# EAGLE board feederboard (EAGLE 9.0.0)
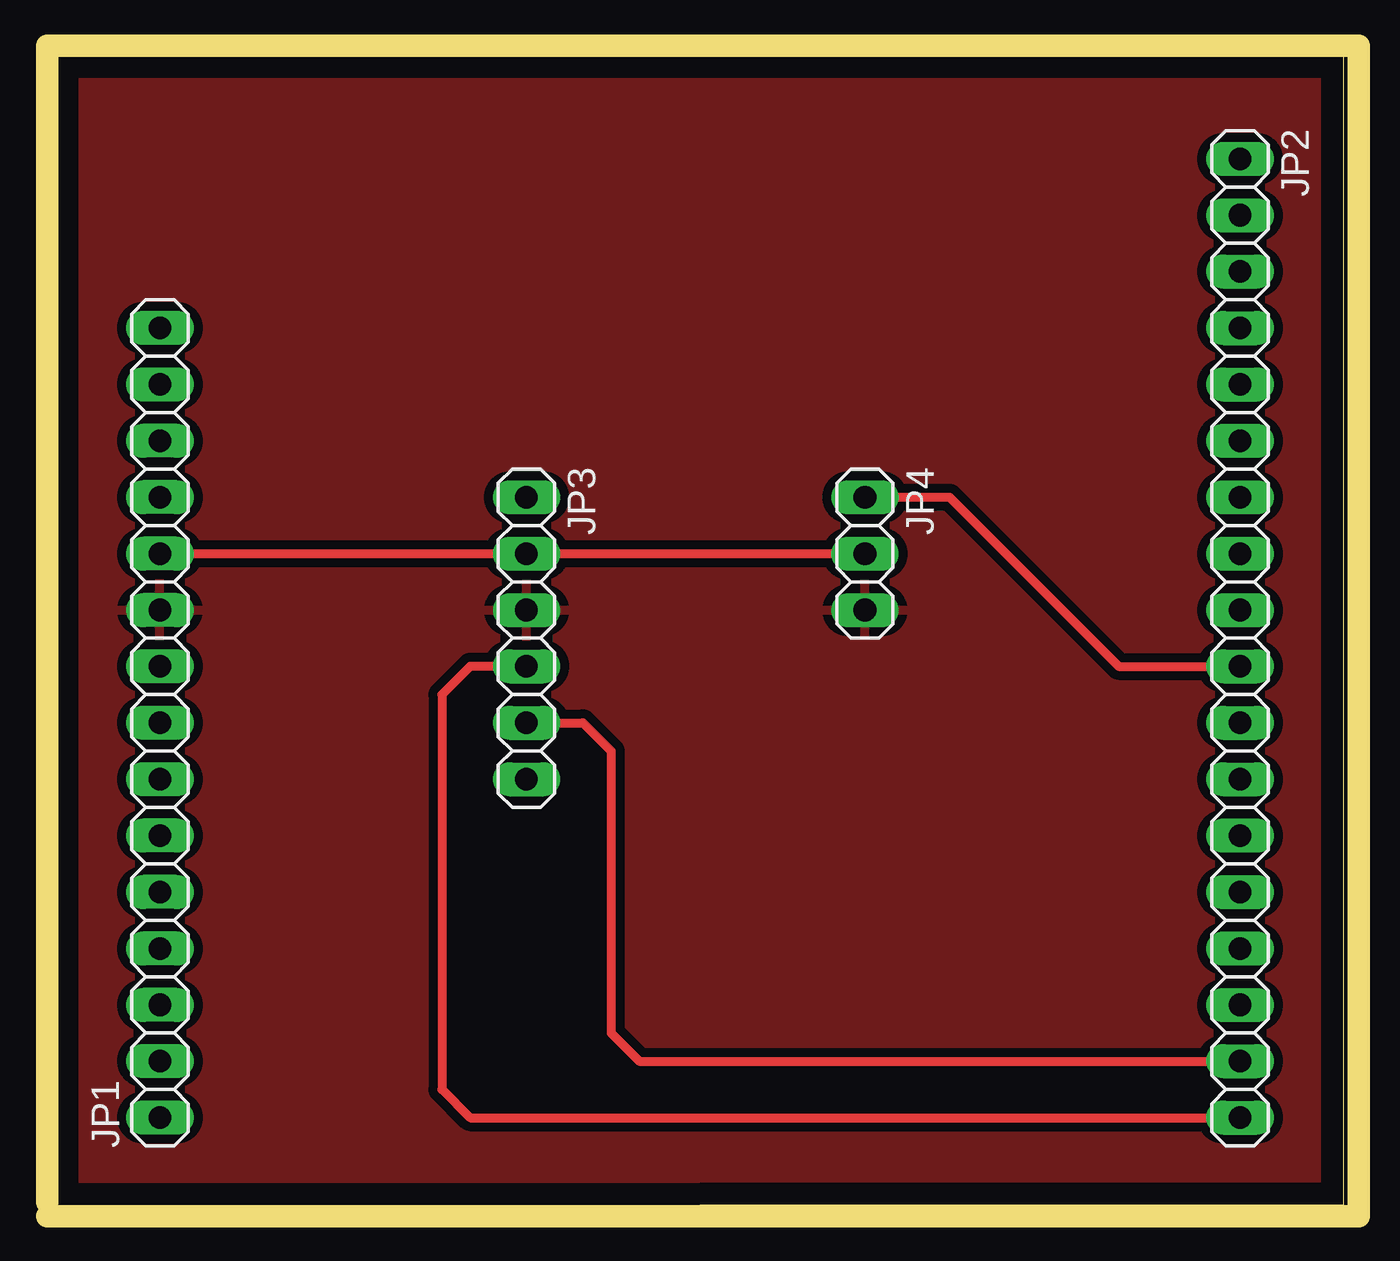
[diagram p0: board, top side]

Size 58.02 x 51.77 mm. Coordinates in mm from the lower left corner, seen from the top.
Outline: 0,0 58.02,0.03 58.02,51.77 0,51.74 0,0
Copper layers (1*16): Top 0.035mm / dielectric 1.5mm / Bottom 0.035mm
Design rules "default *": minimum track width 6mil, minimum drill 1mm, track to track 16mil, track to pad 16mil, pad to pad 16mil, via to via 16mil, smd to smd 16mil, copper to edge 40mil, drill to drill 6mil, minimum pad ring 10mil, minimum via ring 8mil, stop-mask expansion 4mil, vias tented up to drill 0mil, thermal gap 16mil
Milling: 4 lines

## Footprints (pad centres in the part's own frame; a part is rotated, then mirrored left to right if it is on the bottom)
1X15 = drill 1.016 long: 1 -17.78,0; 2 -15.24,0; 3 -12.7,0; 4 -10.16,0; 5 -7.62,0; 6 -5.08,0; 7 -2.54,0; 8 0,0; 9 2.54,0; 10 5.08,0; 11 7.62,0; 12 10.16,0; 13 12.7,0; 14 15.24,0; 15 17.78,0
1X18 = drill 1.016 long: 1 -21.59,0; 2 -19.05,0; 3 -16.51,0; 4 -13.97,0; 5 -11.43,0; 6 -8.89,0; 7 -6.35,0; 8 -3.81,0; 9 -1.27,0; 10 1.27,0; 11 3.81,0; 12 6.35,0; 13 8.89,0; 14 11.43,0; 15 13.97,0; 16 16.51,0; 17 19.05,0; 18 21.59,0
1X06 = drill 1.016 long: 1 -6.35,0; 2 -3.81,0; 3 -1.27,0; 4 1.27,0; 5 3.81,0; 6 6.35,0
1X03 = drill 1.016 long: 1 -2.54,0; 2 0,0; 3 2.54,0

## Placement (x,y rotation side)
JP1  [1X15]  4.7,21.72 90 top
JP2  [1X18]  53.34,25.53 270 top
JP3  [1X06]  21.21,25.53 270 top
JP4  [1X03]  36.45,29.34 270 top

## Library data of the parts
JP1-JP4 = pinhead

## Nets
DATA: JP2.10 JP4.1
GND: JP1.10 JP3.3 JP4.3
RX: JP2.17 JP3.5
TX: JP2.18 JP3.4
VCC: JP1.11 JP3.2 JP4.2

## Tracks (layer width: path | path; a pad name or v marks a point on that pad's centre or on a via)
DATA
  Top 0.406: JP4.1 40.26,31.88 47.88,24.26 JP2.10
GND
  pour Top (isolate 0.406): -0.38,0.13 -0.38,52.2 58.04,52.2 58.04,0.13
RX
  Top 0.406: JP3.5 23.75,21.72 25.02,20.45 25.02,7.75 26.29,6.48 JP2.17
TX
  Top 0.406: JP3.4 18.67,24.26 17.4,22.99 17.4,5.21 18.67,3.94 JP2.18
VCC
  Top 0.406: JP1.11 JP3.2 JP4.2